# EAGLE board ZED-F9P_NEO-D9S_Combo-Panel (EAGLE 9.6.2), part 1 of 3
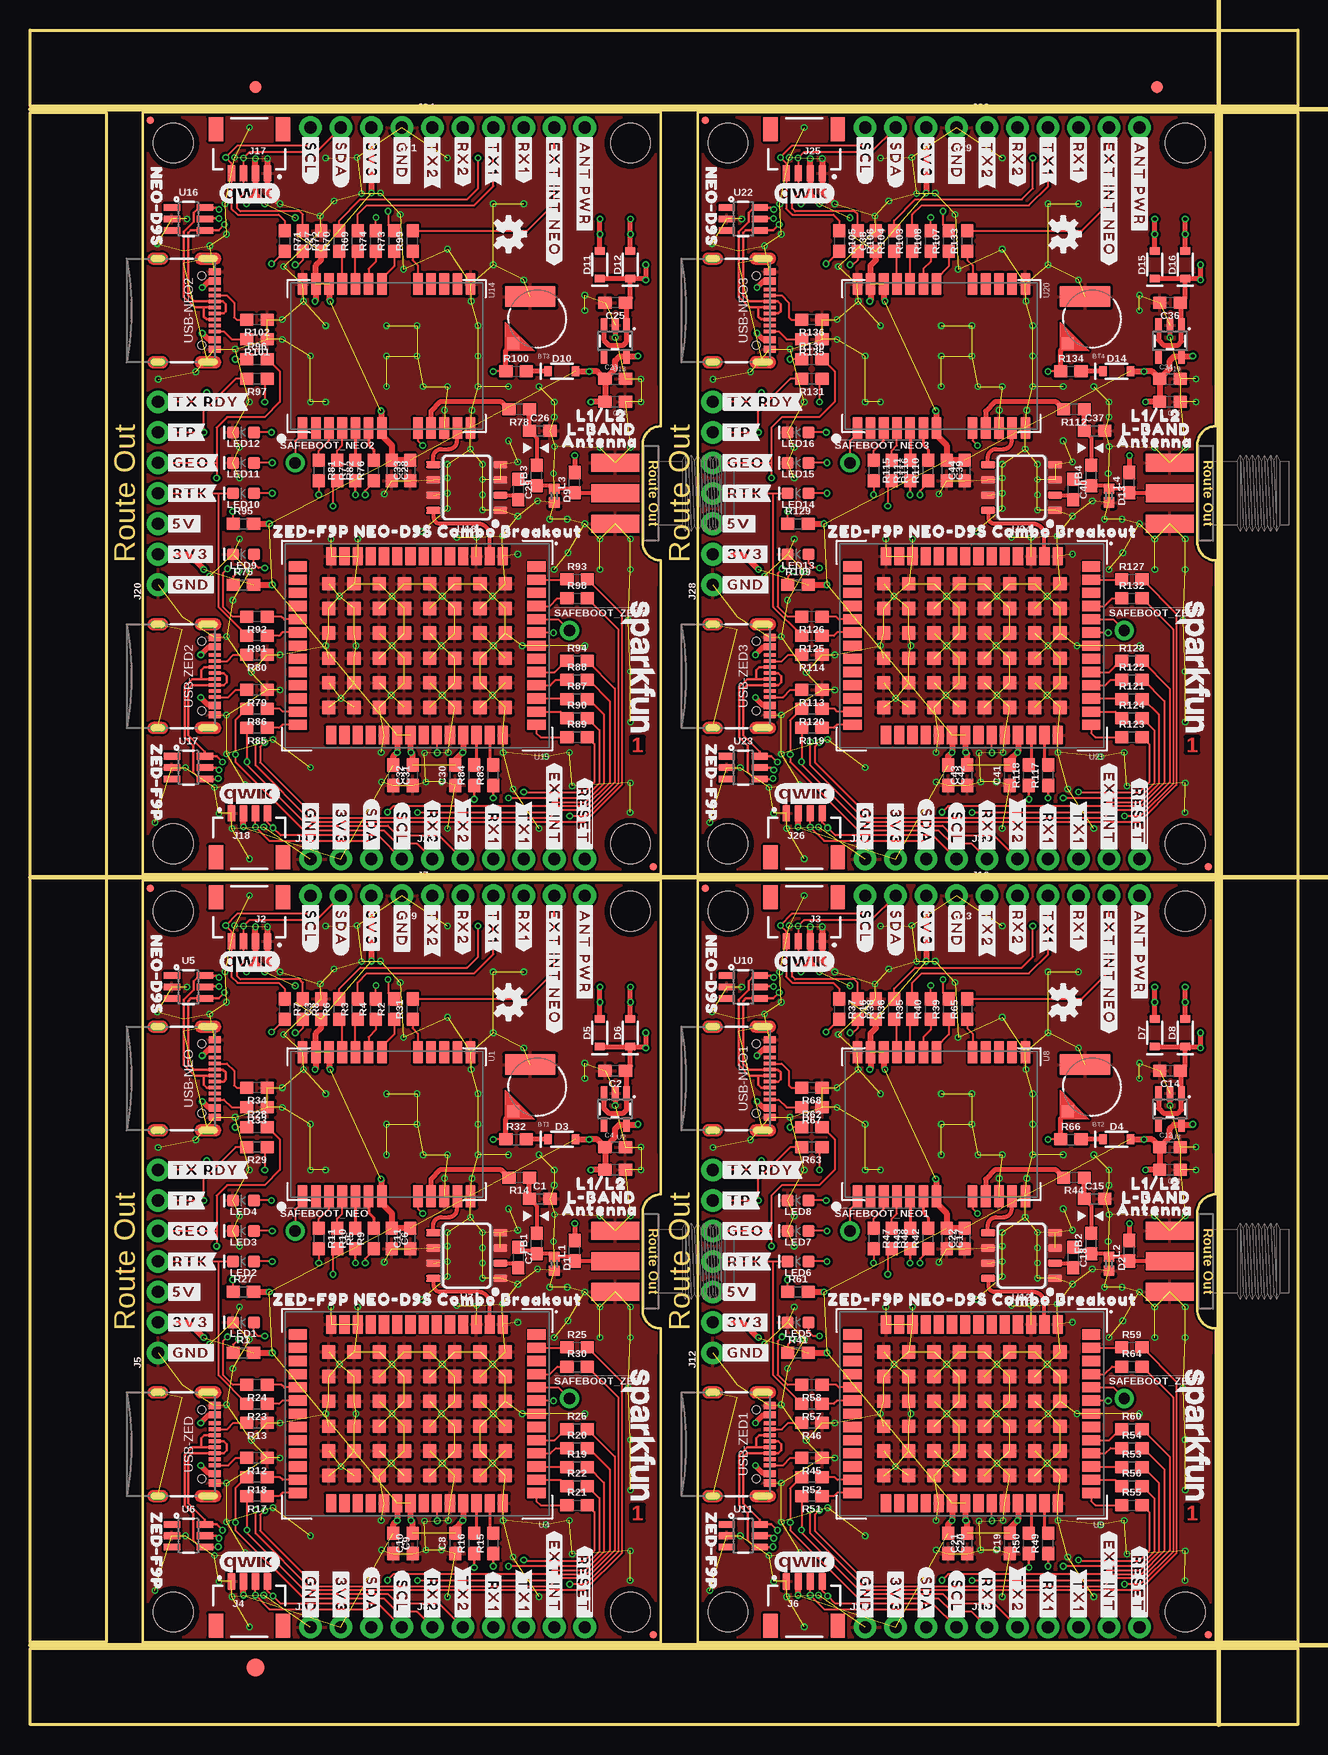
[diagram p0: board, top side]
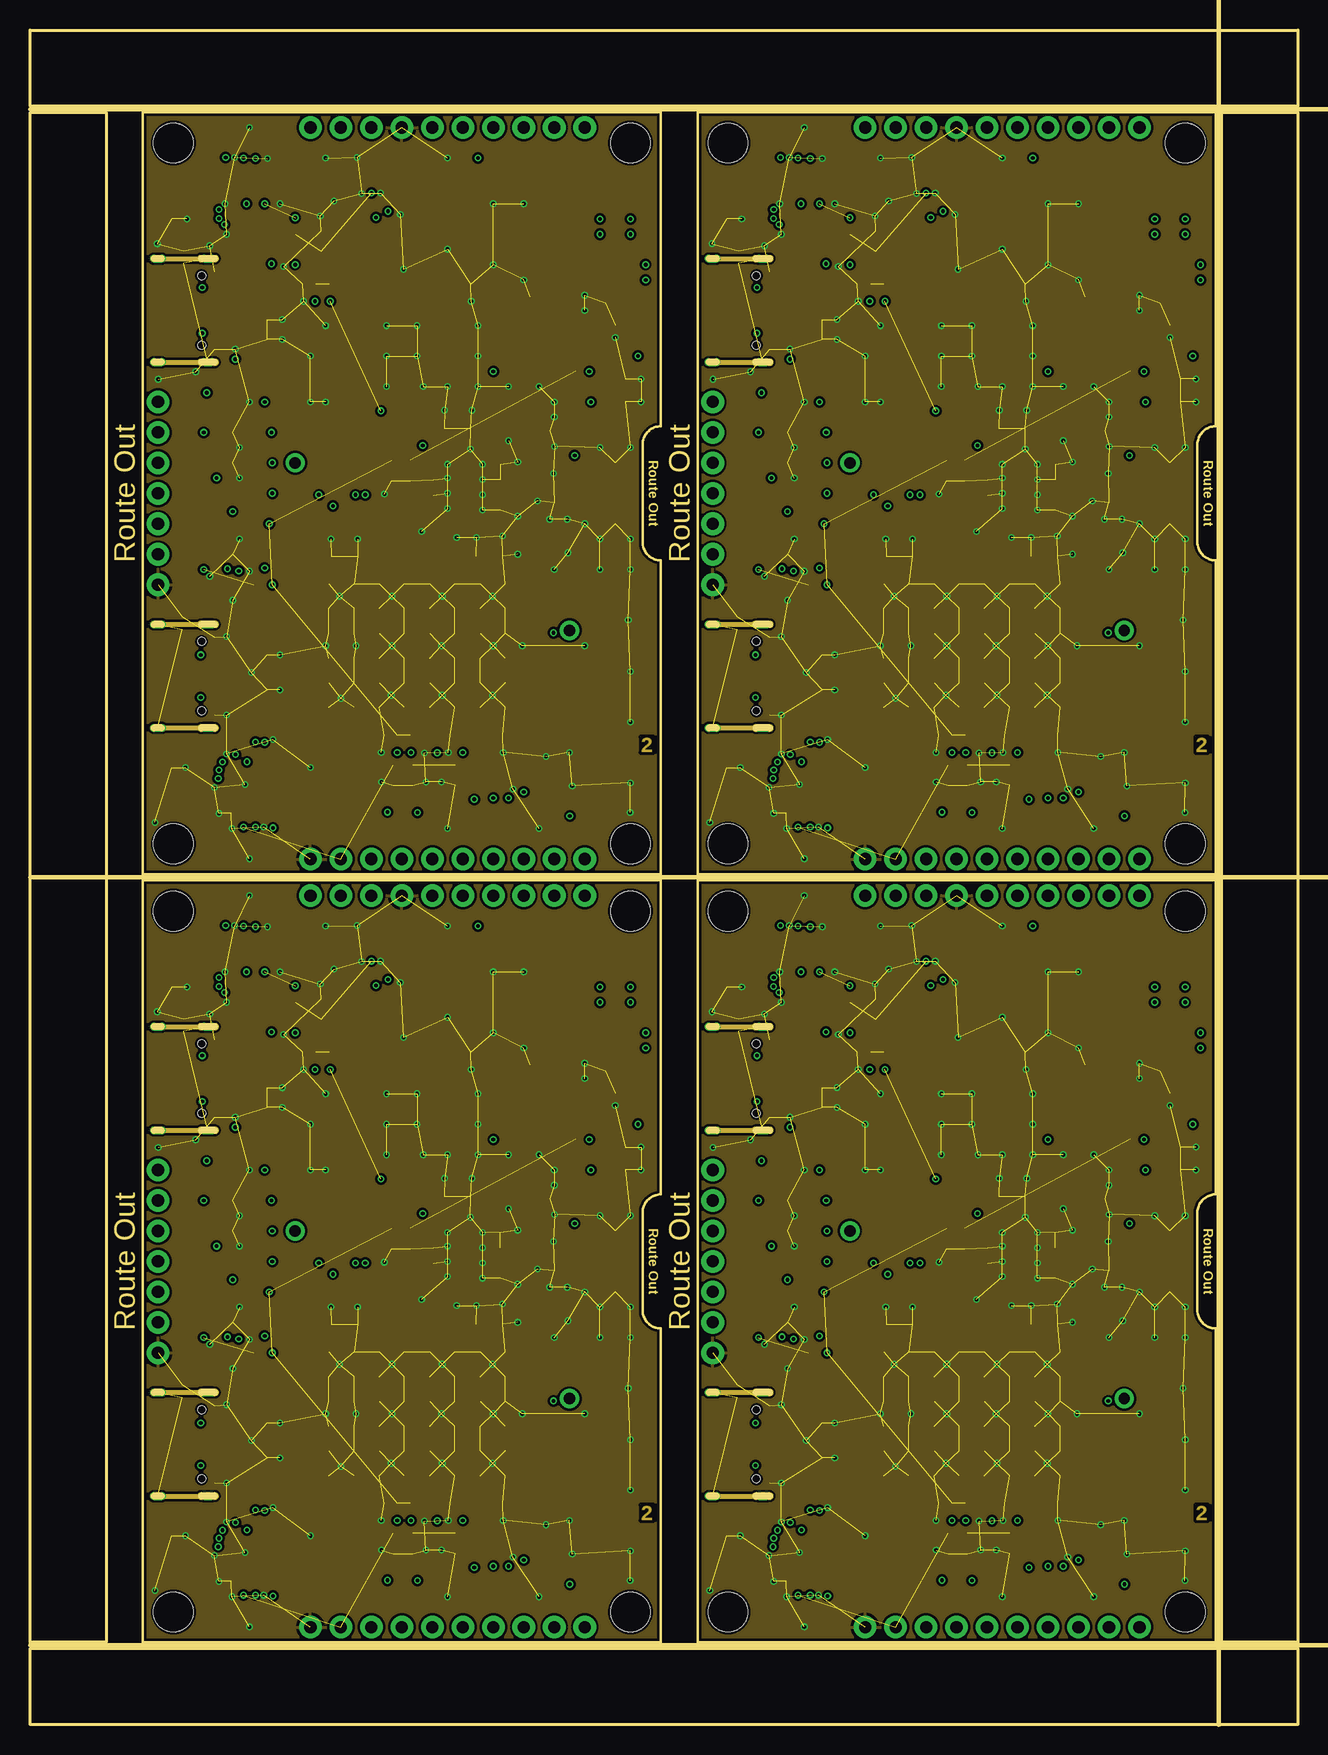
[diagram p1: board, inner layer Route2]
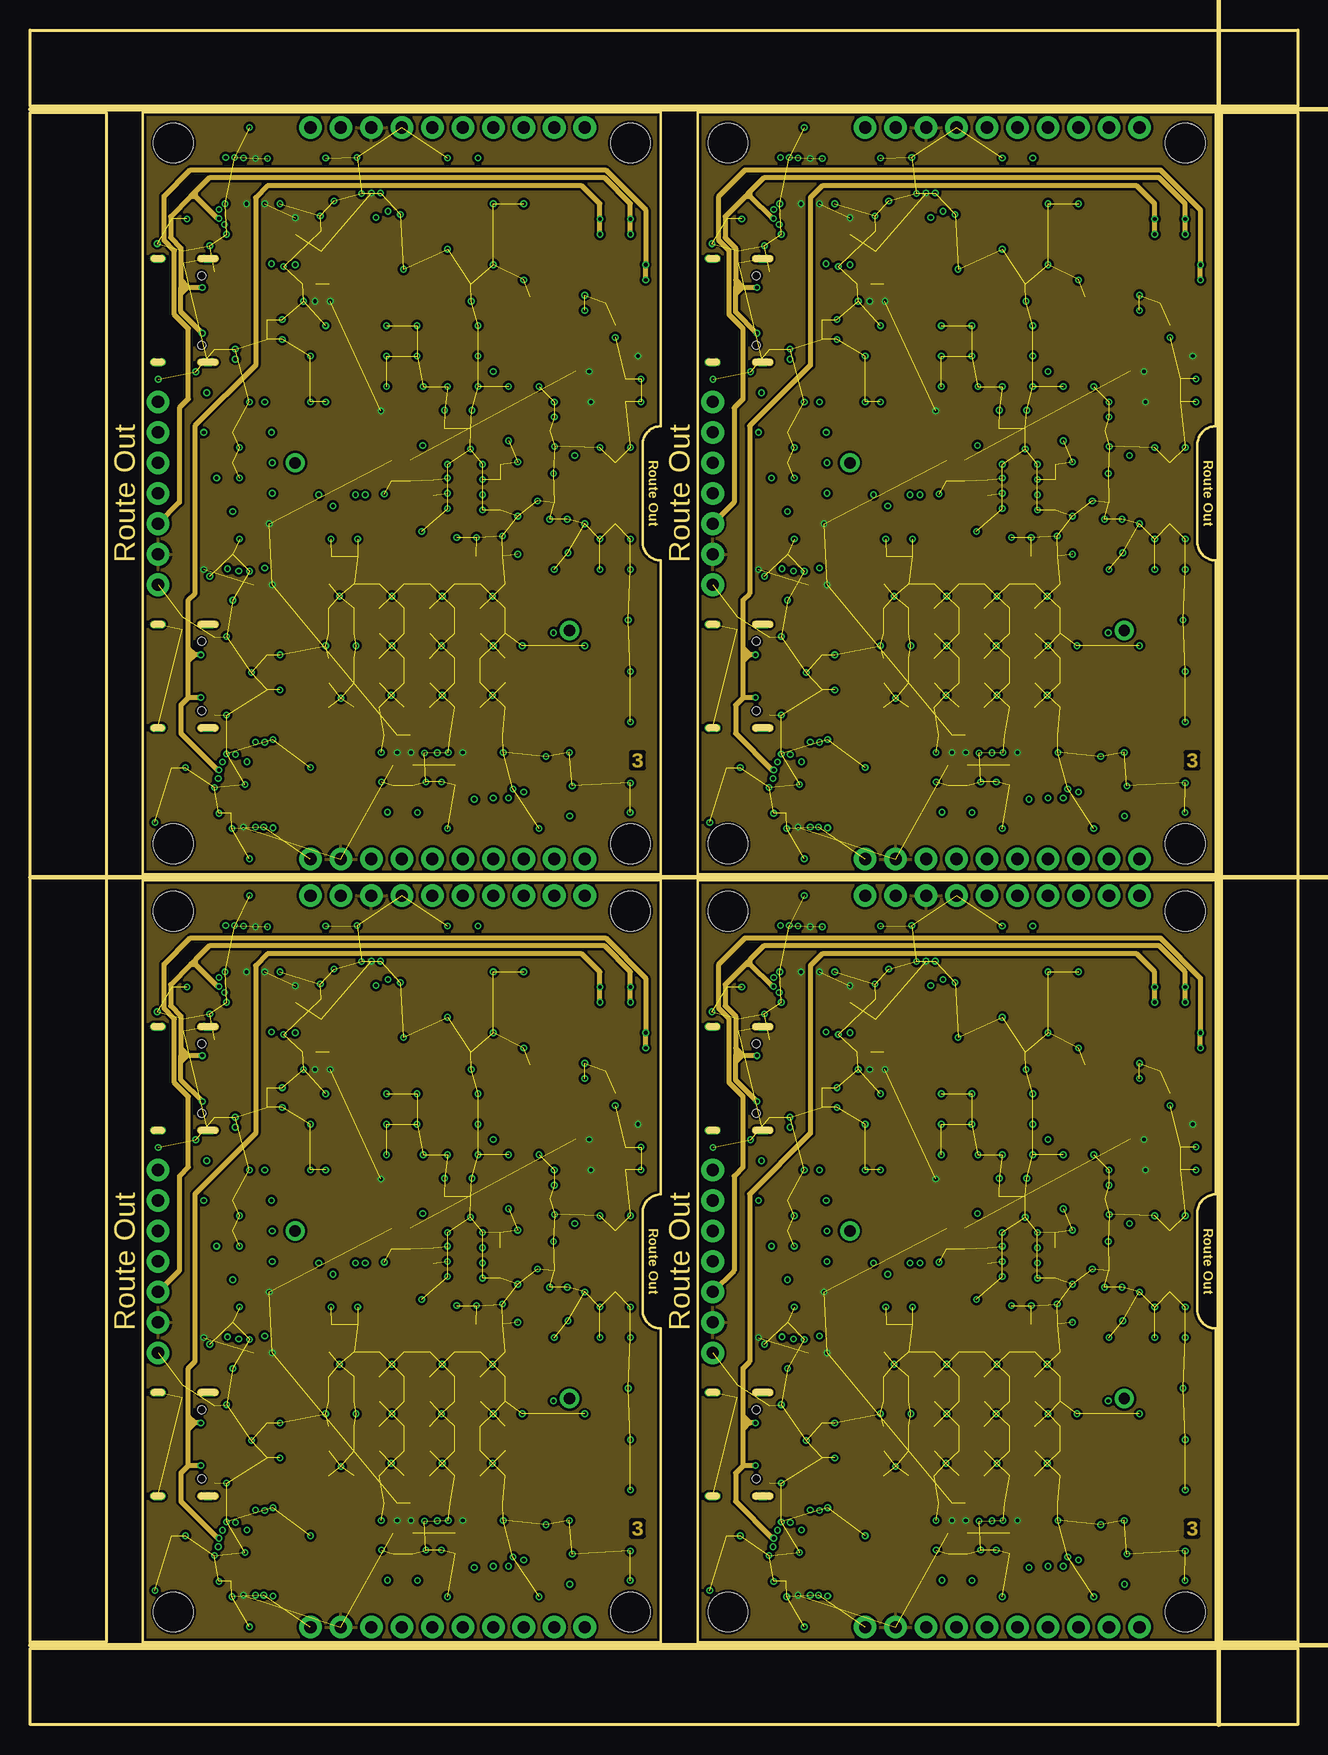
[diagram p2: board, inner layer Route15]
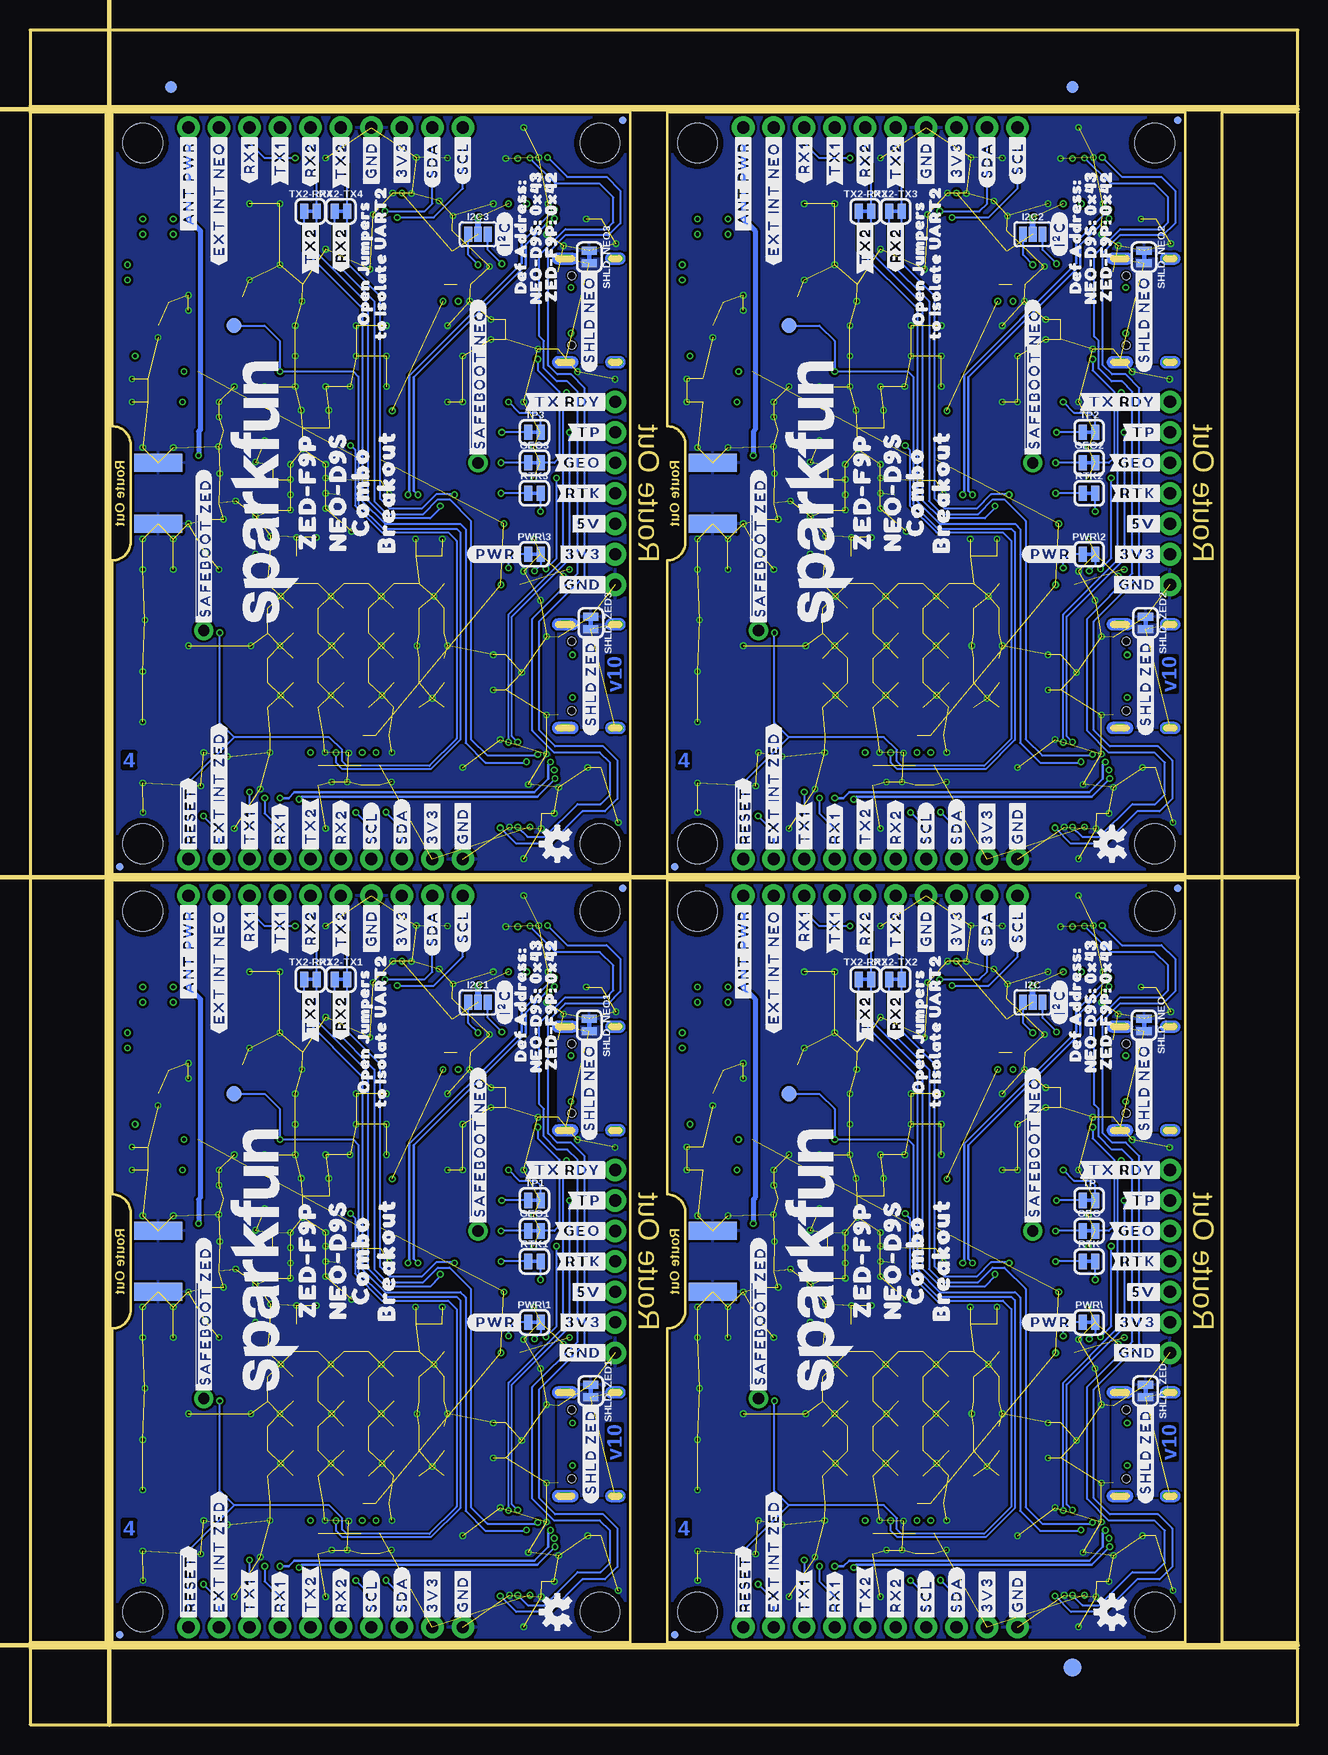
[diagram p3: board, bottom side, seen from below]

Size 105.66 x 141.22 mm. Coordinates in mm from the lower left corner, seen from the top.
Outline: 9.4,6.86 9.4,70.36 52.58,70.36 52.58,44.2 arc90 51.05,42.67 51.05,34.54 arc90 52.58,33.02 52.58,6.86 9.4,6.86
Outline: 55.63,6.86 55.63,70.36 98.81,70.36 98.81,44.2 arc90 97.28,42.67 97.28,34.54 arc90 98.81,33.02 98.81,6.86 55.63,6.86
Outline: 9.4,70.87 9.4,134.37 52.58,134.37 52.58,108.2 arc90 51.05,106.68 51.05,98.55 arc90 52.58,97.03 52.58,70.87 9.4,70.87
Outline: 55.63,70.87 55.63,134.37 98.81,134.37 98.81,108.2 arc90 97.28,106.68 97.28,98.55 arc90 98.81,97.03 98.81,70.87 55.63,70.87
Outline: 0,6.35 105.66,6.35 105.66,0 0,0 0,6.35
Outline: 99.31,134.37 105.66,134.37 105.66,6.86 99.31,6.86 99.31,134.37
Outline: 0,141.22 105.66,141.22 105.66,134.87 0,134.87 0,141.22
Outline: 0,134.37 6.35,134.37 6.35,6.86 0,6.86 0,134.37
Copper layers (1*2*15*16): Top 0.035559375mm / dielectric 0.47751875mm / Route2 0.035559375mm / dielectric 0.47751875mm / Route15 0.035559375mm / dielectric 0.47751875mm / Bottom 0.035559375mm
Design rules "ZED-F9P_NEO-D9S_Combo": minimum track width 5mil, minimum drill 0.2mm, track to track 5mil, track to pad 5mil, pad to pad 5mil, via to via 5mil, smd to smd 5mil, copper to edge 7mil, drill to drill 7mil, minimum pad ring 5mil, minimum via ring 5mil, stop-mask expansion 2.5mil, vias tented up to drill 25mil, thermal gap 10mil
Net classes: 2 3.3V: width 0.508 mm; 4 DiffPair: width 0.203 mm, clearance 0.127 mm
tRestrict: 12 lines
Milling: 4 lines

## Footprints (pad centres in the part's own frame; a part is rotated, then mirrored left to right if it is on the bottom)
1X01_NO_SILK = drill 0.95 pad 1.6: 1 0,0
MS421R_IV03E = smd 1 x 1: + 2.022,2.032 | smd 4.2 x 1.7: - 0.6,-1.85
0603 = smd 1.1 x 1: 1 -0.85,0; 2 0.85,0
0402 = smd 0.85 x 0.9: 1 -0.58,0; 2 0.58,0
SOD-323 = smd 0.63 x 0.83: A 1.15,0; C -1.15,0
FIDUCIAL-1X2 = smd 1 x 1: 1 0,0
FIDUCIAL-1.5X3 = smd 1.5 x 1.5: 1 0,0
SMT-JUMPER_2_NC_TRACE_SILK = smd 0.66 x 1.27: 1 -0.521,0; 2 0.521,0
SMT-JUMPER_3_NO_SILK = smd 0.635 x 1.27: 1 -0.813,0; 2 0,0; 3 0.813,0
SMA-EDGE = smd 1.5 x 4: GND@0 -2.54,0; GND@1 2.54,0; SIG 0,0 | smd 1.5 x 4 bottom: GND@2 -2.54,0; GND@3 2.54,0
JST04_1MM_RA = smd 0.6 x 1.35: 1 -1.5,0; 2 -0.5,0; 3 0.5,0; 4 1.5,0 | smd 1.2 x 2: NC1 2.8,-3.675; NC2 -2.8,-3.675
1X07_NO_SILK = drill 1.016 pad 1.88: 1 0,0; 2 2.54,0; 3 5.08,0; 4 7.62,0; 5 10.16,0; 6 12.7,0; 7 15.24,0
1X06_NO_SILK = drill 1.016 pad 1.88: 1 0,0; 2 2.54,0; 3 5.08,0; 4 7.62,0; 5 10.16,0; 6 12.7,0
1X04_NO_SILK = drill 1.016 pad 1.88: 1 0,0; 2 2.54,0; 3 5.08,0; 4 7.62,0
STAND-OFF = hole 3.302: 0,0
MICRO-FIDUCIAL = smd 0.635 x 0.635: 1 0,0
0603_NO-CREAM = smd 1.1 x 1: 1 -0.85,0; 2 0.85,0
LED-0603 = smd 1 x 1: A -0.877,0; C 0.877,0
NEO-M9N/M8T/M8U/D9S = smd 1.8 x 0.8: 1 6,-7; 2 6,-5.9; 3 6,-4.8; 4 6,-3.7; 5 6,-2.6; 6 6,-1.5; 7 6,-0.4; 8 6,2.6; 9 6,3.7; 10 6,4.8; 11 6,5.9; 12 6,7; 13 -6,7; 14 -6,5.9; 15 -6,4.8; 16 -6,3.7; 17 -6,2.6; 18 -6,-0.4; 19 -6,-1.5; 20 -6,-2.6; 21 -6,-3.7; 22 -6,-4.8; 23 -6,-5.9; 24 -6,-7
SOT23-5 = smd 0.55 x 1.2: 1 -0.95,-1.3; 2 0,-1.3; 3 0.95,-1.3; 4 0.95,1.3; 5 -0.95,1.3
ZED-F9P = smd 0.85 x 1.52: 1 -7.15,-7.45; 2 -6.05,-7.45; 3 -4.95,-7.45; 4 -3.85,-7.45; 5 -2.75,-7.45; 6 -1.65,-7.45; 7 -0.55,-7.45; 8 0.55,-7.45; 9 1.65,-7.45; 10 2.75,-7.45; 11 3.85,-7.45; 12 4.95,-7.45; 13 6.05,-7.45; 14 7.15,-7.45; 28 7.15,7.45; 29 6.05,7.45; 30 4.95,7.45; 31 3.85,7.45; 32 2.75,7.45; 33 1.65,7.45; 34 0.55,7.45; 35 -0.55,7.45; 36 -1.65,7.45; 37 -2.75,7.45; 38 -3.85,7.45; 39 -4.95,7.45; 40 -6.05,7.45; 41 -7.15,7.45 | smd 1.52 x 0.85: 15 9.95,-6.6; 16 9.95,-5.5; 17 9.95,-4.4; 18 9.95,-3.3; 19 9.95,-2.2; 20 9.95,-1.1; 21 9.95,0; 22 9.95,1.1; 23 9.95,2.2; 24 9.95,3.3; 25 9.95,4.4; 26 9.95,5.5; 27 9.95,6.6; 42 -9.95,6.6; 43 -9.95,5.5; 44 -9.95,4.4; 45 -9.95,3.3; 46 -9.95,2.2; 47 -9.95,1.1; 48 -9.95,0; 49 -9.95,-1.1; 50 -9.95,-2.2; 51 -9.95,-3.3; 52 -9.95,-4.4; 53 -9.95,-5.5; 54 -9.95,-6.6 | smd 1.1 x 1.1: 55 -1.05,-1.05; 56 -3.15,-1.05; 57 -5.25,-1.05; 58 -7.35,-1.05; 59 -1.05,-3.1; 60 -3.15,-3.1; 61 -5.25,-3.1; 62 -7.35,-3.1; 63 -1.05,-5.15; 64 -3.15,-5.15; 65 -5.25,-5.15; 66 -7.35,-5.15; 67 -1.05,5.15; 68 -3.15,5.15; 69 -5.25,5.15; 70 -7.35,5.15; 71 -1.05,3.1; 72 -3.15,3.1; 73 -5.25,3.1; 74 -7.35,3.1; 75 -1.05,1.05; 76 -3.15,1.05; 77 -5.25,1.05; 78 -7.35,1.05; 79 1.05,1.05; 80 3.15,1.05; 81 5.25,1.05; 82 7.35,1.05; 83 1.05,3.1; 84 3.15,3.1; 85 5.25,3.1; 86 7.35,3.1; 87 1.05,5.15; 88 3.15,5.15; 89 5.25,5.15; 90 7.35,5.15; 91 1.05,-5.15; 92 3.15,-5.15; 93 5.25,-5.15; 94 7.35,-5.15; 95 1.05,-3.1; 96 3.15,-3.1; 97 5.25,-3.1; 98 7.35,-3.1; 99 1.05,-1.05; 100 3.15,-1.05; 101 5.25,-1.05; 102 7.35,-1.05
SOT-23-6 = smd 0.55 x 1.35: 1 -0.95,-1.375; 2 0,-1.375; 3 0.95,-1.375; 4 0.95,1.375; 5 0,1.375; 6 -0.95,1.375
XX21 = smd 0.6 x 1.2: 1 -1.905,-2.8; 2 -0.635,-2.8; 3 0.635,-2.8; 4 1.905,-2.8; 5 1.905,2.8; 6 0.635,2.8; 7 -0.635,2.8; 8 -1.905,2.8
USB-C-16P_4LAYER-PADS = smd 0.3 x 1: A5 -1.25,-0.34; A6 -0.25,-0.34; A7 0.25,-0.34; A8 1.25,-0.34; B5 1.75,-0.34; B6 0.75,-0.34; B7 -0.75,-0.34; B8 -1.75,-0.34 | smd 0.6 x 1: GND -3.225,-0.34; GND2 3.225,-0.34; VBUS1 -2.45,-0.34; VBUS2 2.45,-0.34 | drill 0.4 pad 0.6 long: SHLD1 -4.318,-0.915; SHLD2 4.318,-0.915; SHLD3 -4.318,-5.095; SHLD4 4.318,-5.095 | hole 0.65: -2.89,-1.445; 2.89,-1.445
PAD.03X.05 = smd 1.27 x 1.27: 1 0,0

## Placement (x,y rotation side)
!SAFEBOOT_NEO!  TEST-POINTPOGO_PTH  [1X01_NO_SILK]  22.1,41.15 0 top
!SAFEBOOT_NEO!1  TEST-POINTPOGO_PTH  [1X01_NO_SILK]  68.33,41.15 0 top
!SAFEBOOT_NEO!2  TEST-POINTPOGO_PTH  [1X01_NO_SILK]  22.1,105.16 0 top
!SAFEBOOT_NEO!3  TEST-POINTPOGO_PTH  [1X01_NO_SILK]  68.33,105.16 0 top
!SAFEBOOT_ZED!  TEST-POINTPOGO_PTH  [1X01_NO_SILK]  44.96,27.18 0 top
!SAFEBOOT_ZED!1  TEST-POINTPOGO_PTH  [1X01_NO_SILK]  91.19,27.18 0 top
!SAFEBOOT_ZED!2  TEST-POINTPOGO_PTH  [1X01_NO_SILK]  44.96,91.19 0 top
!SAFEBOOT_ZED!3  TEST-POINTPOGO_PTH  [1X01_NO_SILK]  91.19,91.19 0 top
BT1  RELOWABLE_BATTERY_MS421R  [MS421R_IV03E]  42.29,53.15 180 top
BT2  RELOWABLE_BATTERY_MS421R  [MS421R_IV03E]  88.52,53.15 180 top
BT3  RELOWABLE_BATTERY_MS421R  [MS421R_IV03E]  42.29,117.16 180 top
BT4  RELOWABLE_BATTERY_MS421R  [MS421R_IV03E]  88.52,117.16 180 top
C1  47pF  [0603]  42.48,43.81 0 top
C2  1.0uF  [0603]  48.77,54.48 180 top
C3  1.0uF  [0603]  24.26,59.63 90 top
C4  1.0uF  [0603]  48.77,48.13 0 top
C5  0.1uF  [0603]  48.77,46.23 180 top
C6  1.0uF  [0603]  30.16,40.51 270 top
C7  47pF  [0603]  40.69,38.93 270 top
C8  1.0uF  [0603]  35.43,15.11 90 top
C9  1.0uF  [0603]  30.29,15.11 270 top
C10  0.1uF  [0603]  31.88,15.11 90 top
C11  0.1uF  [0603]  31.69,40.51 90 top
C12  1.0uF  [0603]  95,48.13 0 top
C13  0.1uF  [0603]  95,46.23 180 top
C14  1.0uF  [0603]  95,54.48 180 top
C15  47pF  [0603]  88.71,43.81 0 top
C16  1.0uF  [0603]  70.48,59.63 90 top
C17  1.0uF  [0603]  76.39,40.51 270 top
C18  47pF  [0603]  86.92,38.93 270 top
C19  1.0uF  [0603]  81.66,15.11 90 top
C20  1.0uF  [0603]  76.52,15.11 270 top
C21  0.1uF  [0603]  78.1,15.11 90 top
C22  0.1uF  [0603]  77.91,40.51 90 top
C23  1.0uF  [0603]  48.77,112.14 0 top
C24  0.1uF  [0603]  48.77,110.24 180 top
C25  1.0uF  [0603]  48.77,118.49 180 top
C26  47pF  [0603]  42.48,107.82 0 top
C27  1.0uF  [0603]  24.26,123.63 90 top
C28  1.0uF  [0603]  30.16,104.52 270 top
C29  47pF  [0603]  40.69,102.93 270 top
C30  1.0uF  [0603]  35.43,79.12 90 top
C31  1.0uF  [0603]  30.29,79.12 270 top
C32  0.1uF  [0603]  31.88,79.12 90 top
C33  0.1uF  [0603]  31.69,104.52 90 top
C34  1.0uF  [0603]  95,112.14 0 top
C35  0.1uF  [0603]  95,110.24 180 top
C36  1.0uF  [0603]  95,118.49 180 top
C37  47pF  [0603]  88.71,107.82 0 top
C38  1.0uF  [0603]  70.48,123.63 90 top
C39  1.0uF  [0603]  76.39,104.52 270 top
C40  47pF  [0603]  86.92,102.93 270 top
C41  1.0uF  [0603]  81.66,79.12 90 top
C42  1.0uF  [0603]  76.52,79.12 270 top
C43  0.1uF  [0603]  78.1,79.12 90 top
C44  0.1uF  [0603]  77.91,104.52 90 top
D1  PESD0402-0402  [0402]  43.69,38.42 270 top
D2  PESD0402-0402  [0402]  89.92,38.42 270 top
D3  0.5A/40V/420mV  [SOD-323]  44.32,48.77 0 top
D4  0.5A/40V/420mV  [SOD-323]  90.55,48.77 0 top
D5  1A/23V/620mV  [SOD-323]  47.5,57.66 90 top
D6  1A/23V/620mV  [SOD-323]  50.04,57.66 90 top
D7  1A/23V/620mV  [SOD-323]  93.73,57.66 90 top
D8  1A/23V/620mV  [SOD-323]  96.27,57.66 90 top
D9  PESD0402-0402  [0402]  43.69,102.43 270 top
D10  0.5A/40V/420mV  [SOD-323]  44.32,112.78 0 top
D11  1A/23V/620mV  [SOD-323]  47.5,121.67 90 top
D12  1A/23V/620mV  [SOD-323]  50.04,121.67 90 top
D13  PESD0402-0402  [0402]  89.92,102.43 270 top
D14  0.5A/40V/420mV  [SOD-323]  90.55,112.78 0 top
D15  1A/23V/620mV  [SOD-323]  93.73,121.67 90 top
D16  1A/23V/620mV  [SOD-323]  96.27,121.67 90 top
E$1  [FIDUCIAL-1X2]  18.8,136.46 0 top
E$2  [FIDUCIAL-1X2]  18.8,136.46 0 bottom
E$3  [FIDUCIAL-1X2]  93.92,136.46 0 top
E$4  [FIDUCIAL-1X2]  93.92,136.46 0 bottom
E$5  [FIDUCIAL-1.5X3]  18.8,4.76 0 top
E$6  [FIDUCIAL-1.5X3]  18.8,4.76 0 bottom
FB1  30Ω/1.8A  [0603]  42.21,40.09 90 top
FB2  30Ω/1.8A  [0603]  88.44,40.09 90 top
FB3  30Ω/1.8A  [0603]  42.21,104.1 90 top
FB4  30Ω/1.8A  [0603]  88.44,104.1 90 top
GEO  JUMPER-SMT_2_NC_TRACE_SILK  [SMT-JUMPER_2_NC_TRACE_SILK]  17.4,41.15 0 bottom
GEO1  JUMPER-SMT_2_NC_TRACE_SILK  [SMT-JUMPER_2_NC_TRACE_SILK]  63.63,41.15 0 bottom
GEO2  JUMPER-SMT_2_NC_TRACE_SILK  [SMT-JUMPER_2_NC_TRACE_SILK]  17.4,105.16 0 bottom
GEO3  JUMPER-SMT_2_NC_TRACE_SILK  [SMT-JUMPER_2_NC_TRACE_SILK]  63.63,105.16 0 bottom
I2C  JUMPER-SMT_3_NO_SILK  [SMT-JUMPER_3_NO_SILK]  22.1,60.2 0 bottom
I2C1  JUMPER-SMT_3_NO_SILK  [SMT-JUMPER_3_NO_SILK]  68.33,60.2 0 bottom
I2C2  JUMPER-SMT_3_NO_SILK  [SMT-JUMPER_3_NO_SILK]  22.1,124.21 0 bottom
I2C3  JUMPER-SMT_3_NO_SILK  [SMT-JUMPER_3_NO_SILK]  68.33,124.21 0 bottom
J1  ANTENNA-SMA-GROUNDEDEDGE_SMA  [SMA-EDGE]  48.77,38.61 270 top
J2  Qwiic Right Angle  [JST04_1MM_RA]  18.29,65.28 180 top
J3  Qwiic Right Angle  [JST04_1MM_RA]  64.52,65.28 180 top
J4  Qwiic Right Angle  [JST04_1MM_RA]  18.29,11.94 0 top
J5  [1X07_NO_SILK]  10.67,30.99 90 top
J6  Qwiic Right Angle  [JST04_1MM_RA]  64.52,11.94 0 top
J7  [1X06_NO_SILK]  33.53,69.09 0 top
J8  [1X06_NO_SILK]  33.53,8.13 0 top
J9  [1X04_NO_SILK]  30.99,69.09 180 top
J10  [1X04_NO_SILK]  23.37,8.13 0 top
J11  ANTENNA-SMA-GROUNDEDEDGE_SMA  [SMA-EDGE]  95,38.61 270 top
J12  [1X07_NO_SILK]  56.9,30.99 90 top
J13  [1X04_NO_SILK]  77.22,69.09 180 top
J14  [1X04_NO_SILK]  69.6,8.13 0 top
J15  [1X06_NO_SILK]  79.76,8.13 0 top
J16  [1X06_NO_SILK]  79.76,69.09 0 top
J17  Qwiic Right Angle  [JST04_1MM_RA]  18.29,129.29 180 top
J18  Qwiic Right Angle  [JST04_1MM_RA]  18.29,75.95 0 top
J19  ANTENNA-SMA-GROUNDEDEDGE_SMA  [SMA-EDGE]  48.77,102.62 270 top
J20  [1X07_NO_SILK]  10.67,95 90 top
J21  [1X04_NO_SILK]  30.99,133.1 180 top
J22  [1X04_NO_SILK]  23.37,72.14 0 top
J23  [1X06_NO_SILK]  33.53,72.14 0 top
J24  [1X06_NO_SILK]  33.53,133.1 0 top
J25  Qwiic Right Angle  [JST04_1MM_RA]  64.52,129.29 180 top
J26  Qwiic Right Angle  [JST04_1MM_RA]  64.52,75.95 0 top
J27  ANTENNA-SMA-GROUNDEDEDGE_SMA  [SMA-EDGE]  95,102.62 270 top
J28  [1X07_NO_SILK]  56.9,95 90 top
J29  [1X04_NO_SILK]  77.22,133.1 180 top
J30  [1X04_NO_SILK]  69.6,72.14 0 top
J31  [1X06_NO_SILK]  79.76,72.14 0 top
J32  [1X06_NO_SILK]  79.76,133.1 0 top
JP1  STAND-OFF  [STAND-OFF]  58.17,67.79 0 top
JP2  STAND-OFF  [STAND-OFF]  96.27,67.79 0 top
JP3  FIDUCIALUFIDUCIAL  [MICRO-FIDUCIAL]  98.17,7.49 0 top
JP4  FIDUCIALUFIDUCIAL  [MICRO-FIDUCIAL]  56.26,69.7 0 top
JP5  FIDUCIALUFIDUCIAL  [MICRO-FIDUCIAL]  98.17,7.49 0 bottom
JP6  FIDUCIALUFIDUCIAL  [MICRO-FIDUCIAL]  56.26,69.7 0 bottom
JP7  STAND-OFF  [STAND-OFF]  58.17,9.4 0 top
JP8  STAND-OFF  [STAND-OFF]  96.27,9.4 0 top
JP9  STAND-OFF  [STAND-OFF]  11.94,131.8 0 top
JP10  STAND-OFF  [STAND-OFF]  50.04,131.8 0 top
JP11  FIDUCIALUFIDUCIAL  [MICRO-FIDUCIAL]  51.94,71.5 0 top
JP12  FIDUCIALUFIDUCIAL  [MICRO-FIDUCIAL]  10.03,133.71 0 top
JP13  FIDUCIALUFIDUCIAL  [MICRO-FIDUCIAL]  51.94,71.5 0 bottom
JP14  FIDUCIALUFIDUCIAL  [MICRO-FIDUCIAL]  10.03,133.71 0 bottom
JP15  STAND-OFF  [STAND-OFF]  11.94,73.41 0 top
JP16  STAND-OFF  [STAND-OFF]  50.04,73.41 0 top
JP17  STAND-OFF  [STAND-OFF]  58.17,131.8 0 top
JP18  STAND-OFF  [STAND-OFF]  96.27,131.8 0 top
JP19  FIDUCIALUFIDUCIAL  [MICRO-FIDUCIAL]  98.17,71.5 0 top
JP20  FIDUCIALUFIDUCIAL  [MICRO-FIDUCIAL]  56.26,133.71 0 top
JP21  FIDUCIALUFIDUCIAL  [MICRO-FIDUCIAL]  51.94,7.49 0 top
JP22  FIDUCIALUFIDUCIAL  [MICRO-FIDUCIAL]  98.17,71.5 0 bottom
JP23  FIDUCIALUFIDUCIAL  [MICRO-FIDUCIAL]  56.26,133.71 0 bottom
JP24  STAND-OFF  [STAND-OFF]  58.17,73.41 0 top
JP25  STAND-OFF  [STAND-OFF]  96.27,73.41 0 top
JP31  STAND-OFF  [STAND-OFF]  11.94,67.79 0 top
JP41  STAND-OFF  [STAND-OFF]  50.04,67.79 0 top
JP61  FIDUCIALUFIDUCIAL  [MICRO-FIDUCIAL]  10.03,69.7 0 top
JP71  FIDUCIALUFIDUCIAL  [MICRO-FIDUCIAL]  51.94,7.49 0 bottom
JP81  FIDUCIALUFIDUCIAL  [MICRO-FIDUCIAL]  10.03,69.7 0 bottom
JP91  STAND-OFF  [STAND-OFF]  11.94,9.4 0 top
JP101  STAND-OFF  [STAND-OFF]  50.04,9.4 0 top
L1  DNP  [0603_NO-CREAM]  45.39,39.5 90 top
L2  DNP  [0603_NO-CREAM]  91.62,39.5 90 top
L3  DNP  [0603_NO-CREAM]  45.39,103.51 90 top
L4  DNP  [0603_NO-CREAM]  91.62,103.51 90 top
LED1  RED  [LED-0603]  17.78,33.53 180 top
LED2  BLUE  [LED-0603]  17.78,38.61 180 top
LED3  BLUE  [LED-0603]  17.78,41.15 180 top
LED4  BLUE  [LED-0603]  17.78,43.69 180 top
LED5  RED  [LED-0603]  64.01,33.53 180 top
LED6  BLUE  [LED-0603]  64.01,38.61 180 top
LED7  BLUE  [LED-0603]  64.01,41.15 180 top
LED8  BLUE  [LED-0603]  64.01,43.69 180 top
LED9  RED  [LED-0603]  17.78,97.54 180 top
LED10  BLUE  [LED-0603]  17.78,102.62 180 top
LED11  BLUE  [LED-0603]  17.78,105.16 180 top
LED12  BLUE  [LED-0603]  17.78,107.7 180 top
LED13  RED  [LED-0603]  64.01,97.54 180 top
LED14  BLUE  [LED-0603]  64.01,102.62 180 top
LED15  BLUE  [LED-0603]  64.01,105.16 180 top
LED16  BLUE  [LED-0603]  64.01,107.7 180 top
LOGO1  OSHW-LOGOS  [OSHW-LOGO-S]  39.88,60.2 270 top
LOGO2  SFE_LOGO_NAME.1_INCH  [SFE_LOGO_NAME_.1]  50.67,24.13 270 top
LOGO3  QWIIC_LOGO_5MM  [QWIIC_5MM]  18.29,13.59 0 top
LOGO4  OSHW-LOGOS  [OSHW-LOGO-S]  15.49,9.4 90 bottom
LOGO5  OSHW-LOGOS  [OSHW-LOGO-S]  61.72,9.4 90 bottom
LOGO6  QWIIC_LOGO_5MM  [QWIIC_5MM]  18.29,63.63 0 top
LOGO7  OSHW-LOGOS  [OSHW-LOGO-S]  86.11,60.2 270 top
LOGO8  SFE_LOGO_NAME.1_INCH  [SFE_LOGO_NAME_.1]  96.9,24.13 270 top
LOGO9  QWIIC_LOGO_5MM  [QWIIC_5MM]  64.52,13.59 0 top
LOGO10  QWIIC_LOGO_5MM  [QWIIC_5MM]  64.52,63.63 0 top
LOGO11  OSHW-LOGOS  [OSHW-LOGO-S]  15.49,73.41 90 bottom
LOGO12  OSHW-LOGOS  [OSHW-LOGO-S]  39.88,124.21 270 top
LOGO13  SFE_LOGO_NAME.1_INCH  [SFE_LOGO_NAME_.1]  50.67,88.14 270 top
LOGO14  QWIIC_LOGO_5MM  [QWIIC_5MM]  18.29,77.6 0 top
LOGO15  QWIIC_LOGO_5MM  [QWIIC_5MM]  18.29,127.64 0 top
LOGO16  OSHW-LOGOS  [OSHW-LOGO-S]  61.72,73.41 90 bottom
LOGO17  OSHW-LOGOS  [OSHW-LOGO-S]  86.11,124.21 270 top
LOGO18  SFE_LOGO_NAME.1_INCH  [SFE_LOGO_NAME_.1]  96.9,88.14 270 top
LOGO19  QWIIC_LOGO_5MM  [QWIIC_5MM]  64.52,77.6 0 top
LOGO20  QWIIC_LOGO_5MM  [QWIIC_5MM]  64.52,127.64 0 top
PWR\  JUMPER-SMT_2_NC_TRACE_SILK  [SMT-JUMPER_2_NC_TRACE_SILK]  17.4,33.53 0 bottom
PWR\1  JUMPER-SMT_2_NC_TRACE_SILK  [SMT-JUMPER_2_NC_TRACE_SILK]  63.63,33.53 0 bottom
PWR\2  JUMPER-SMT_2_NC_TRACE_SILK  [SMT-JUMPER_2_NC_TRACE_SILK]  17.4,97.54 0 bottom
PWR\3  JUMPER-SMT_2_NC_TRACE_SILK  [SMT-JUMPER_2_NC_TRACE_SILK]  63.63,97.54 0 bottom
R1  4.7k  [0603]  17.78,30.99 0 top
R2  33  [0603]  30.35,59.63 90 top
R3  33  [0603]  27.3,59.63 90 top
R4  33  [0603]  28.83,59.63 90 top
R5  33  [0603]  25.59,40.51 270 top
R6  33  [0603]  25.78,59.63 90 top
R7  2.2k  [0603]  21.21,59.63 270 top
R8  2.2k  [0603]  22.73,59.63 270 top
R9  27  [0603]  28.64,40.51 90 top
R10  27  [0603]  27.11,40.51 90 top
R11  33  [0603]  24.07,40.51 270 top
R12  5.1k  [0603]  18.92,22.23 180 top
R13  5.1k  [0603]  18.92,25.15 180 top
R14  10  [0603]  40.77,45.59 180 top
R15  27  [0603]  38.61,15.11 90 top
R16  27  [0603]  37.02,15.11 90 top
R17  33  [0603]  18.92,19.05 180 top
R18  33  [0603]  18.92,20.64 180 top
R19  33  [0603]  45.59,21.46 0 top
R20  33  [0603]  45.59,23.05 0 top
R21  33  [0603]  45.59,18.29 0 top
R22  33  [0603]  45.59,19.88 0 top
R23  33  [0603]  18.92,26.73 180 top
R24  33  [0603]  18.92,28.32 180 top
R25  33  [0603]  45.59,31.43 0 top
R26  33  [0603]  45.59,24.64 0 top
R27  1k  [0603]  17.78,36.07 0 top
R28  1k  [0603]  18.92,49.78 0 top
R29  1k  [0603]  18.92,48.13 180 top
R30  33  [0603]  45.59,29.84 0 top
R31  33  [0603]  31.88,59.63 90 top
R32  3.3k  [0603]  40.51,48.77 0 top
R33  5.1k  [0603]  18.92,51.43 180 top
R34  5.1k  [0603]  18.92,53.09 180 top
R35  33  [0603]  73.53,59.63 90 top
R36  33  [0603]  72.01,59.63 90 top
R37  2.2k  [0603]  67.44,59.63 270 top
R38  2.2k  [0603]  68.96,59.63 270 top
R39  33  [0603]  76.58,59.63 90 top
R40  33  [0603]  75.06,59.63 90 top
R41  4.7k  [0603]  64.01,30.99 0 top
R42  27  [0603]  74.87,40.51 90 top
R43  27  [0603]  73.34,40.51 90 top
R44  10  [0603]  86.99,45.59 180 top
R45  5.1k  [0603]  65.15,22.23 180 top
R46  5.1k  [0603]  65.15,25.15 180 top
R47  33  [0603]  70.29,40.51 270 top
R48  33  [0603]  71.82,40.51 270 top
R49  27  [0603]  84.84,15.11 90 top
R50  27  [0603]  83.25,15.11 90 top
R51  33  [0603]  65.15,19.05 180 top
R52  33  [0603]  65.15,20.64 180 top
R53  33  [0603]  91.82,21.46 0 top
R54  33  [0603]  91.82,23.05 0 top
R55  33  [0603]  91.82,18.29 0 top
R56  33  [0603]  91.82,19.88 0 top
R57  33  [0603]  65.15,26.73 180 top
R58  33  [0603]  65.15,28.32 180 top
R59  33  [0603]  91.82,31.43 0 top
R60  33  [0603]  91.82,24.64 0 top
R61  1k  [0603]  64.01,36.07 0 top
R62  1k  [0603]  65.15,49.78 0 top
R63  1k  [0603]  65.15,48.13 180 top
R64  33  [0603]  91.82,29.84 0 top
R65  33  [0603]  78.1,59.63 90 top
R66  3.3k  [0603]  86.74,48.77 0 top
R67  5.1k  [0603]  65.15,51.43 180 top
R68  5.1k  [0603]  65.15,53.09 180 top
R69  33  [0603]  27.3,123.63 90 top
R70  33  [0603]  25.78,123.63 90 top
R71  2.2k  [0603]  21.21,123.63 270 top
R72  2.2k  [0603]  22.73,123.63 270 top
R73  33  [0603]  30.35,123.63 90 top
R74  33  [0603]  28.83,123.63 90 top
R75  4.7k  [0603]  17.78,95 0 top
R76  27  [0603]  28.64,104.52 90 top
R77  27  [0603]  27.11,104.52 90 top
R78  10  [0603]  40.77,109.6 180 top
R79  5.1k  [0603]  18.92,86.23 180 top
R80  5.1k  [0603]  18.92,89.15 180 top
R81  33  [0603]  24.07,104.52 270 top
R82  33  [0603]  25.59,104.52 270 top
R83  27  [0603]  38.61,79.12 90 top
R84  27  [0603]  37.02,79.12 90 top
R85  33  [0603]  18.92,83.06 180 top
R86  33  [0603]  18.92,84.65 180 top
R87  33  [0603]  45.59,85.47 0 top
R88  33  [0603]  45.59,87.06 0 top
R89  33  [0603]  45.59,82.3 0 top
R90  33  [0603]  45.59,83.88 0 top
R91  33  [0603]  18.92,90.74 180 top
R92  33  [0603]  18.92,92.33 180 top
R93  33  [0603]  45.59,95.44 0 top
R94  33  [0603]  45.59,88.65 0 top
R95  1k  [0603]  17.78,100.08 0 top
R96  1k  [0603]  18.92,113.79 0 top
R97  1k  [0603]  18.92,112.14 180 top
R98  33  [0603]  45.59,93.85 0 top
R99  33  [0603]  31.88,123.63 90 top
R100  3.3k  [0603]  40.51,112.78 0 top
R101  5.1k  [0603]  18.92,115.44 180 top
R102  5.1k  [0603]  18.92,117.09 180 top
R103  33  [0603]  73.53,123.63 90 top
R104  33  [0603]  72.01,123.63 90 top
R105  2.2k  [0603]  67.44,123.63 270 top
R106  2.2k  [0603]  68.96,123.63 270 top
R107  33  [0603]  76.58,123.63 90 top
R108  33  [0603]  75.06,123.63 90 top
R109  4.7k  [0603]  64.01,95 0 top
R110  27  [0603]  74.87,104.52 90 top
R111  27  [0603]  73.34,104.52 90 top
R112  10  [0603]  86.99,109.6 180 top
R113  5.1k  [0603]  65.15,86.23 180 top
R114  5.1k  [0603]  65.15,89.15 180 top
R115  33  [0603]  70.29,104.52 270 top
R116  33  [0603]  71.82,104.52 270 top
R117  27  [0603]  84.84,79.12 90 top
R118  27  [0603]  83.25,79.12 90 top
R119  33  [0603]  65.15,83.06 180 top
R120  33  [0603]  65.15,84.65 180 top
R121  33  [0603]  91.82,85.47 0 top
R122  33  [0603]  91.82,87.06 0 top
R123  33  [0603]  91.82,82.3 0 top
R124  33  [0603]  91.82,83.88 0 top
R125  33  [0603]  65.15,90.74 180 top
R126  33  [0603]  65.15,92.33 180 top
R127  33  [0603]  91.82,95.44 0 top
R128  33  [0603]  91.82,88.65 0 top
R129  1k  [0603]  64.01,100.08 0 top
R130  1k  [0603]  65.15,113.79 0 top
R131  1k  [0603]  65.15,112.14 180 top
R132  33  [0603]  91.82,93.85 0 top
R133  33  [0603]  78.1,123.63 90 top
R134  3.3k  [0603]  86.74,112.78 0 top
R135  5.1k  [0603]  65.15,115.44 180 top
R136  5.1k  [0603]  65.15,117.09 180 top
RTK  JUMPER-SMT_2_NC_TRACE_SILK  [SMT-JUMPER_2_NC_TRACE_SILK]  17.4,38.61 0 bottom
RTK1  JUMPER-SMT_2_NC_TRACE_SILK  [SMT-JUMPER_2_NC_TRACE_SILK]  63.63,38.61 0 bottom
RTK2  JUMPER-SMT_2_NC_TRACE_SILK  [SMT-JUMPER_2_NC_TRACE_SILK]  17.4,102.62 0 bottom
RTK3  JUMPER-SMT_2_NC_TRACE_SILK  [SMT-JUMPER_2_NC_TRACE_SILK]  63.63,102.62 0 bottom
RX2-TX1  JUMPER-SMT_2_NC_TRACE_SILK  [SMT-JUMPER_2_NC_TRACE_SILK]  79.76,62.1 0 bottom
RX2-TX2  JUMPER-SMT_2_NC_TRACE_SILK  [SMT-JUMPER_2_NC_TRACE_SILK]  33.53,62.1 0 bottom
RX2-TX3  JUMPER-SMT_2_NC_TRACE_SILK  [SMT-JUMPER_2_NC_TRACE_SILK]  33.53,126.11 0 bottom
RX2-TX4  JUMPER-SMT_2_NC_TRACE_SILK  [SMT-JUMPER_2_NC_TRACE_SILK]  79.76,126.11 0 bottom
SHLD_NEO  JUMPER-SMT_2_NC_TRACE_SILK  [SMT-JUMPER_2_NC_TRACE_SILK]  12.83,58.29 270 bottom
SHLD_NEO1  JUMPER-SMT_2_NC_TRACE_SILK  [SMT-JUMPER_2_NC_TRACE_SILK]  59.05,58.29 270 bottom
SHLD_NEO2  JUMPER-SMT_2_NC_TRACE_SILK  [SMT-JUMPER_2_NC_TRACE_SILK]  12.83,122.3 270 bottom
SHLD_NEO3  JUMPER-SMT_2_NC_TRACE_SILK  [SMT-JUMPER_2_NC_TRACE_SILK]  59.05,122.3 270 bottom
SHLD_ZED  JUMPER-SMT_2_NC_TRACE_SILK  [SMT-JUMPER_2_NC_TRACE_SILK]  12.7,27.81 270 bottom
SHLD_ZED1  JUMPER-SMT_2_NC_TRACE_SILK  [SMT-JUMPER_2_NC_TRACE_SILK]  58.93,27.81 270 bottom
SHLD_ZED2  JUMPER-SMT_2_NC_TRACE_SILK  [SMT-JUMPER_2_NC_TRACE_SILK]  12.7,91.82 270 bottom
SHLD_ZED3  JUMPER-SMT_2_NC_TRACE_SILK  [SMT-JUMPER_2_NC_TRACE_SILK]  58.93,91.82 270 bottom
TP  JUMPER-SMT_2_NC_TRACE_SILK  [SMT-JUMPER_2_NC_TRACE_SILK]  17.4,43.69 0 bottom
TP1  JUMPER-SMT_2_NC_TRACE_SILK  [SMT-JUMPER_2_NC_TRACE_SILK]  63.63,43.69 0 bottom
TP2  JUMPER-SMT_2_NC_TRACE_SILK  [SMT-JUMPER_2_NC_TRACE_SILK]  17.4,107.7 0 bottom
TP3  JUMPER-SMT_2_NC_TRACE_SILK  [SMT-JUMPER_2_NC_TRACE_SILK]  63.63,107.7 0 bottom
TX2-RX1  JUMPER-SMT_2_NC_TRACE_SILK  [SMT-JUMPER_2_NC_TRACE_SILK]  82.3,62.1 0 bottom
TX2-RX2  JUMPER-SMT_2_NC_TRACE_SILK  [SMT-JUMPER_2_NC_TRACE_SILK]  36.07,62.1 0 bottom
TX2-RX3  JUMPER-SMT_2_NC_TRACE_SILK  [SMT-JUMPER_2_NC_TRACE_SILK]  36.07,126.11 0 bottom
TX2-RX4  JUMPER-SMT_2_NC_TRACE_SILK  [SMT-JUMPER_2_NC_TRACE_SILK]  82.3,126.11 0 bottom
U1  U-BLOX_NEO-D9S-00B  [NEO-M9N/M8T/M8U/D9S]  29.72,50.04 270 top
U2  3.3V  [SOT23-5]  48.77,51.31 180 top
U3  3.3V  [SOT23-5]  95,51.31 180 top
U4  U-BLOX_ZED-F9P  [ZED-F9P]  32.26,25.91 180 top
U5  ESD Diode  [SOT-23-6]  13.21,61.47 270 top
U6  ESD Diode  [SOT-23-6]  13.21,15.75 270 top
U7  BP2G1+_POWER_SPLITTER  [XX21]  36.4,39.09 90 top
U8  U-BLOX_NEO-D9S-00B  [NEO-M9N/M8T/M8U/D9S]  75.95,50.04 270 top
U9  U-BLOX_ZED-F9P  [ZED-F9P]  78.49,25.91 180 top
U10  ESD Diode  [SOT-23-6]  59.44,61.47 270 top
U11  ESD Diode  [SOT-23-6]  59.44,15.75 270 top
U12  BP2G1+_POWER_SPLITTER  [XX21]  82.63,39.09 90 top
U13  3.3V  [SOT23-5]  48.77,115.32 180 top
U14  U-BLOX_NEO-D9S-00B  [NEO-M9N/M8T/M8U/D9S]  29.72,114.05 270 top
U15  U-BLOX_ZED-F9P  [ZED-F9P]  32.26,89.92 180 top
U16  ESD Diode  [SOT-23-6]  13.21,125.48 270 top
U17  ESD Diode  [SOT-23-6]  13.21,79.76 270 top
U18  BP2G1+_POWER_SPLITTER  [XX21]  36.4,103.1 90 top
U19  3.3V  [SOT23-5]  95,115.32 180 top
U20  U-BLOX_NEO-D9S-00B  [NEO-M9N/M8T/M8U/D9S]  75.95,114.05 270 top
U21  U-BLOX_ZED-F9P  [ZED-F9P]  78.49,89.92 180 top
U22  ESD Diode  [SOT-23-6]  59.44,125.48 270 top
U23  ESD Diode  [SOT-23-6]  59.44,79.76 270 top
U24  BP2G1+_POWER_SPLITTER  [XX21]  82.63,103.1 90 top
U$1  [#GND#0]  30.99,68.58 270 top
U$2  [#GND#0]  11.18,30.99 0 top
U$3  [#GND#0]  23.37,8.64 90 bottom
U$4  [#GND#1]  23.37,8.64 270 top
U$5  [#GND#1]  11.18,30.99 0 bottom
U$6  [#GND#1]  30.99,68.58 90 bottom
U$7  [#SHLD_ZED#15]  12.7,22.73 90 bottom
U$8  [#SDA#0]  25.91,68.58 270 top
U$9  [#SCL#0]  30.99,8.64 90 bottom
U$10  [#SDA#0]  28.45,8.64 90 bottom
U$11  [#SDA#1]  28.45,8.64 270 top
U$12  [#SDA#1]  25.91,68.58 90 bottom
U$13  [#SCL#0]  23.37,68.58 270 top
U$14  [L#BAND18]  47.62,43.94 0 top
U$15  [#SCL#1]  23.37,68.58 90 bottom
U$16  [#RTK#0]  11.18,38.61 0 top
U$17  [#RTK#1]  11.18,38.61 0 bottom
U$18  [#GEO#0]  11.18,41.15 0 top
U$19  [#GEO#1]  11.18,41.15 0 bottom
U$20  [#5V#0]  11.18,36.07 0 top
U$21  [#5V#6]  11.18,36.07 0 bottom
U$22  [#3V3#0]  28.45,68.58 270 top
U$23  [#3V3#0]  25.91,8.64 90 bottom
U$24  [#3V3#4]  28.45,68.58 90 bottom
U$25  [#3V3#4]  25.91,8.64 270 top
U$26  [#TP#0]  11.18,43.69 0 top
U$27  [#TP#1]  11.18,43.69 0 bottom
U$28  [#TX_RDY#0]  11.18,46.23 0 top
U$29  [#TX_RDY#1]  11.18,46.23 0 bottom
U$30  [#SCL#1]  30.99,8.64 270 top
U$31  [#TX2#0]  36.07,61.47 90 bottom
U$32  [#RX2#0]  33.53,61.47 90 bottom
U$33  [L1#L218]  47.62,45.08 0 top
U$34  [#RX2#0]  33.53,8.64 270 top
U$35  [#RX2#0]  36.07,68.58 90 bottom
U$36  [#RX2#3]  36.07,68.58 270 top
U$37  [#RX2#3]  33.53,8.64 90 bottom
U$38  [#GND#0]  77.22,68.58 270 top
U$39  [#TX2#0]  36.07,8.64 270 top
U$40  [#TX2#0]  33.53,68.58 90 bottom
U$41  [#TX2#3]  33.53,68.58 270 top
U$42  [#TX2#3]  36.07,8.64 90 bottom
U$43  [#RX1#0]  38.61,8.64 270 top
U$44  [#RX1#0]  41.15,68.58 90 bottom
U$45  [##RESET##0]  46.23,8.64 270 top
U$46  [##RESET##1]  46.23,8.64 90 bottom
U$47  [#EXT_INT#0]  43.69,8.64 270 top
U$48  [#EXT_INT_ZED#0]  43.69,8.64 90 bottom
U$49  [#RX1#2]  41.15,68.58 270 top
U$50  [#RX1#2]  38.61,8.64 90 bottom
U$51  [#TX1#0]  41.15,8.64 270 top
U$52  [#I�C#0]  19.88,60.2 90 bottom
U$53  [#SHLD_NEO#12]  12.83,53.09 90 bottom
U$54  [ANTENNA18]  47.5,42.93 0 top
U$55  [NEO#D9S16]  33.78,38.73 90 bottom
U$56  [#3V3#0]  11.18,33.53 0 top
U$57  [#TX1#0]  38.61,68.58 90 bottom
U$58  [#ANT_PWR#0]  46.23,68.58 90 bottom
U$59  [#ANT_PWR#1]  46.23,68.58 270 top
U$60  [#TX1#2]  38.61,68.58 270 top
U$61  [#TX1#2]  41.15,8.64 90 bottom
U$62  [#EXT_INT_NEO#0]  43.69,68.58 270 top
U$63  [#EXT_INT_NEO#1]  43.69,68.58 90 bottom
U$64  [COMBO16]  31.88,38.73 90 bottom
U$65  [ZED#F9P10]  10.54,14.48 270 top
U$66  [NEO#D9S10]  10.54,62.48 270 top
U$67  [BREAKOUT17]  29.72,38.73 90 bottom
U$68  [SFE_LOGO_NAME_.2]  39.88,38.73 90 bottom
U$69  [#PWR#0]  18.29,33.53 0 bottom
U$70  [#3V3#4]  11.18,33.53 0 bottom
U$71  [##SAFEBOOT#_NEO#13]  22.1,48.13 90 bottom
U$72  [##SAFEBOOT#_ZED#14]  44.96,34.04 90 bottom
U$73  [OPEN_JUMPERS13]  31.62,57.78 90 bottom
U$74  [TO_ISOLATE_UART214]  30.23,57.78 90 bottom
U$75  [ZED#F9P_NEO#D9S_COMBO_BREAKOUT0]  33.15,35.43 0 top
U$76  [DEF_ADDRESS#_12]  18.54,60.2 90 bottom
U$77  [#GND#0]  57.4,30.99 0 top
U$78  [ZED#F9P16]  36.32,38.73 90 bottom
U$79  [NEO#D9S#13]  17.27,57.91 90 bottom
U$80  [ZED#F9P#13]  16,58.04 90 bottom
U$81  [0X4313]  17.27,63.63 90 bottom
U$82  [0X4213]  16,63.63 90 bottom
U$83  [#GND#0]  69.6,8.64 90 bottom
U$84  [#GND#1]  69.6,8.64 270 top
U$85  [#GND#1]  57.4,30.99 0 bottom
U$86  [#GND#1]  77.22,68.58 90 bottom
U$87  [#5V#0]  57.4,36.07 0 top
U$88  [#5V#6]  57.4,36.07 0 bottom
U$89  [#3V3#0]  74.68,68.58 270 top
U$90  [#3V3#0]  72.14,8.64 90 bottom
U$91  [#3V3#4]  74.68,68.58 90 bottom
U$92  [#3V3#4]  72.14,8.64 270 top
U$93  [##RESET##0]  92.46,8.64 270 top
U$94  [##RESET##1]  92.46,8.64 90 bottom
U$95  [#EXT_INT#0]  89.92,8.64 270 top
U$96  [#I�C#0]  66.1,60.2 90 bottom
U$97  [#3V3#0]  57.4,33.53 0 top
U$98  [#ANT_PWR#0]  92.46,68.58 90 bottom
U$99  [#ANT_PWR#1]  92.46,68.58 270 top
U$100  [#RTK#0]  57.4,38.61 0 top
U$101  [#RTK#1]  57.4,38.61 0 bottom
U$102  [#GEO#0]  57.4,41.15 0 top
U$103  [#GEO#1]  57.4,41.15 0 bottom
U$104  [#TP#0]  57.4,43.69 0 top
U$105  [#TP#1]  57.4,43.69 0 bottom
U$106  [#TX_RDY#0]  57.4,46.23 0 top
U$107  [#TX_RDY#1]  57.4,46.23 0 bottom
U$108  [#RX2#0]  79.76,8.64 270 top
U$109  [#RX2#0]  82.3,68.58 90 bottom
U$110  [#RX2#3]  82.3,68.58 270 top
U$111  [#RX2#3]  79.76,8.64 90 bottom
U$112  [#TX2#0]  82.3,8.64 270 top
U$113  [#TX2#0]  79.76,68.58 90 bottom
U$114  [#TX2#3]  79.76,68.58 270 top
U$115  [#TX2#3]  82.3,8.64 90 bottom
U$116  [#RX1#0]  84.84,8.64 270 top
U$117  [#RX1#0]  87.38,68.58 90 bottom
U$118  [#RX1#2]  87.38,68.58 270 top
U$119  [#RX1#2]  84.84,8.64 90 bottom
U$120  [#TX1#0]  87.38,8.64 270 top
U$121  [#TX1#0]  84.84,68.58 90 bottom
U$122  [#TX1#2]  84.84,68.58 270 top
U$123  [#TX1#2]  87.38,8.64 90 bottom
U$124  [#EXT_INT_NEO#0]  89.92,68.58 270 top
U$125  [#EXT_INT_NEO#1]  89.92,68.58 90 bottom
U$126  [#SDA#0]  72.14,68.58 270 top
U$127  [#SDA#0]  74.68,8.64 90 bottom
U$128  [#SDA#1]  74.68,8.64 270 top
U$129  [#SDA#1]  72.14,68.58 90 bottom
U$130  [#SCL#0]  77.22,8.64 90 bottom
U$131  [#SCL#0]  69.6,68.58 270 top
U$132  [#SCL#1]  69.6,68.58 90 bottom
U$133  [#SCL#1]  77.22,8.64 270 top
U$134  [#TX2#0]  82.3,61.47 90 bottom
U$135  [#RX2#0]  79.76,61.47 90 bottom
U$136  [ZED#F9P10]  56.77,14.48 270 top
U$137  [NEO#D9S10]  56.77,62.48 270 top
U$138  [#PWR#0]  64.52,33.53 0 bottom
U$139  [#3V3#4]  57.4,33.53 0 bottom
U$140  [#EXT_INT_ZED#0]  89.92,8.64 90 bottom
U$141  [ZED#F9P_NEO#D9S_COMBO_BREAKOUT0]  79.38,35.43 0 top
U$142  [##SAFEBOOT#_NEO#13]  68.33,48.13 90 bottom
U$143  [##SAFEBOOT#_ZED#14]  91.19,34.04 90 bottom
U$144  [#SHLD_ZED#15]  58.93,22.73 90 bottom
U$145  [#SHLD_NEO#12]  59.05,53.09 90 bottom
U$146  [ZED#F9P16]  82.55,38.73 90 bottom
U$147  [NEO#D9S16]  80.01,38.73 90 bottom
U$148  [COMBO16]  78.1,38.73 90 bottom
U$149  [BREAKOUT17]  75.95,38.73 90 bottom
U$150  [SFE_LOGO_NAME_.2]  86.11,38.73 90 bottom
U$151  [L1#L218]  93.85,45.08 0 top
U$152  [ANTENNA18]  93.73,42.93 0 top
U$153  [L#BAND18]  93.85,43.94 0 top
U$154  [OPEN_JUMPERS13]  77.85,57.78 90 bottom
U$155  [TO_ISOLATE_UART214]  76.45,57.78 90 bottom
U$156  [DEF_ADDRESS#_12]  64.77,60.2 90 bottom
U$157  [NEO#D9S#13]  63.5,57.91 90 bottom
U$158  [ZED#F9P#13]  62.23,58.04 90 bottom
U$159  [0X4313]  63.5,63.63 90 bottom
U$160  [0X4213]  62.23,63.63 90 bottom
U$161  [#GND#0]  30.99,132.59 270 top
U$162  [#GND#0]  11.18,95 0 top
U$163  [#GND#0]  23.37,72.64 90 bottom
U$164  [#GND#1]  23.37,72.64 270 top
U$165  [#GND#1]  11.18,95 0 bottom
U$166  [#GND#1]  30.99,132.59 90 bottom
U$167  [#5V#0]  11.18,100.08 0 top
U$168  [#5V#6]  11.18,100.08 0 bottom
U$169  [#3V3#0]  28.45,132.59 270 top
U$170  [#3V3#0]  25.91,72.64 90 bottom
U$171  [#3V3#4]  28.45,132.59 90 bottom
U$172  [#3V3#4]  25.91,72.64 270 top
U$173  [##RESET##0]  46.23,72.64 270 top
U$174  [##RESET##1]  46.23,72.64 90 bottom
U$175  [#EXT_INT#0]  43.69,72.64 270 top
U$176  [#I�C#0]  19.88,124.21 90 bottom
U$177  [#3V3#0]  11.18,97.54 0 top
U$178  [#ANT_PWR#0]  46.23,132.59 90 bottom
U$179  [#ANT_PWR#1]  46.23,132.59 270 top
U$180  [#RTK#0]  11.18,102.62 0 top
U$181  [#RTK#1]  11.18,102.62 0 bottom
U$182  [#GEO#0]  11.18,105.16 0 top
U$183  [#GEO#1]  11.18,105.16 0 bottom
U$184  [#TP#0]  11.18,107.7 0 top
U$185  [#TP#1]  11.18,107.7 0 bottom
U$186  [#TX_RDY#0]  11.18,110.24 0 top
U$187  [#TX_RDY#1]  11.18,110.24 0 bottom
U$188  [#RX2#0]  33.53,72.64 270 top
U$189  [#RX2#0]  36.07,132.59 90 bottom
U$190  [#RX2#3]  36.07,132.59 270 top
U$191  [#RX2#3]  33.53,72.64 90 bottom
U$192  [#TX2#0]  36.07,72.64 270 top
U$193  [#TX2#0]  33.53,132.59 90 bottom
U$194  [#TX2#3]  33.53,132.59 270 top
U$195  [#TX2#3]  36.07,72.64 90 bottom
U$196  [#RX1#0]  38.61,72.64 270 top
U$197  [#RX1#0]  41.15,132.59 90 bottom
U$198  [#RX1#2]  41.15,132.59 270 top
U$199  [#RX1#2]  38.61,72.64 90 bottom
U$200  [#TX1#0]  41.15,72.64 270 top
U$201  [#TX1#0]  38.61,132.59 90 bottom
U$202  [#TX1#2]  38.61,132.59 270 top
U$203  [#TX1#2]  41.15,72.64 90 bottom
U$204  [#EXT_INT_NEO#0]  43.69,132.59 270 top
U$205  [#EXT_INT_NEO#1]  43.69,132.59 90 bottom
U$206  [#SDA#0]  25.91,132.59 270 top
U$207  [#SDA#0]  28.45,72.64 90 bottom
U$208  [#SDA#1]  28.45,72.64 270 top
U$209  [#SDA#1]  25.91,132.59 90 bottom
U$210  [#SCL#0]  30.99,72.64 90 bottom
U$211  [#SCL#0]  23.37,132.59 270 top
U$212  [#SCL#1]  23.37,132.59 90 bottom
U$213  [#SCL#1]  30.99,72.64 270 top
U$214  [#TX2#0]  36.07,125.48 90 bottom
U$215  [#RX2#0]  33.53,125.48 90 bottom
U$216  [ZED#F9P10]  10.54,78.49 270 top
U$217  [NEO#D9S10]  10.54,126.49 270 top
U$218  [#PWR#0]  18.29,97.54 0 bottom
U$219  [#3V3#4]  11.18,97.54 0 bottom
U$220  [#EXT_INT_ZED#0]  43.69,72.64 90 bottom
U$221  [ZED#F9P_NEO#D9S_COMBO_BREAKOUT0]  33.15,99.44 0 top
U$222  [##SAFEBOOT#_NEO#13]  22.1,112.14 90 bottom
U$223  [##SAFEBOOT#_ZED#14]  44.96,98.04 90 bottom
U$224  [#SHLD_ZED#15]  12.7,86.74 90 bottom
U$225  [#SHLD_NEO#12]  12.83,117.09 90 bottom
U$226  [ZED#F9P16]  36.32,102.74 90 bottom
U$227  [NEO#D9S16]  33.78,102.74 90 bottom
U$228  [COMBO16]  31.88,102.74 90 bottom
U$229  [BREAKOUT17]  29.72,102.74 90 bottom
U$230  [SFE_LOGO_NAME_.2]  39.88,102.74 90 bottom
U$231  [L1#L218]  47.62,109.09 0 top
U$232  [ANTENNA18]  47.5,106.93 0 top
U$233  [L#BAND18]  47.62,107.95 0 top
U$234  [OPEN_JUMPERS13]  31.62,121.79 90 bottom
U$235  [TO_ISOLATE_UART214]  30.23,121.79 90 bottom
U$236  [DEF_ADDRESS#_12]  18.54,124.21 90 bottom
U$237  [NEO#D9S#13]  17.27,121.92 90 bottom
U$238  [ZED#F9P#13]  16,122.05 90 bottom
U$239  [0X4313]  17.27,127.64 90 bottom
U$240  [0X4213]  16,127.64 90 bottom
U$241  [#GND#0]  77.22,132.59 270 top
U$242  [#GND#0]  57.4,95 0 top
U$243  [#GND#0]  69.6,72.64 90 bottom
U$244  [#GND#1]  69.6,72.64 270 top
U$245  [#GND#1]  57.4,95 0 bottom
U$246  [#GND#1]  77.22,132.59 90 bottom
U$247  [#5V#0]  57.4,100.08 0 top
U$248  [#5V#6]  57.4,100.08 0 bottom
U$249  [#3V3#0]  74.68,132.59 270 top
U$250  [#3V3#0]  72.14,72.64 90 bottom
U$251  [#3V3#4]  74.68,132.59 90 bottom
U$252  [#3V3#4]  72.14,72.64 270 top
U$253  [##RESET##0]  92.46,72.64 270 top
U$254  [##RESET##1]  92.46,72.64 90 bottom
U$255  [#EXT_INT#0]  89.92,72.64 270 top
U$256  [#I�C#0]  66.1,124.21 90 bottom
U$257  [#3V3#0]  57.4,97.54 0 top
U$258  [#ANT_PWR#0]  92.46,132.59 90 bottom
U$259  [#ANT_PWR#1]  92.46,132.59 270 top
U$260  [#RTK#0]  57.4,102.62 0 top
U$261  [#RTK#1]  57.4,102.62 0 bottom
U$262  [#GEO#0]  57.4,105.16 0 top
U$263  [#GEO#1]  57.4,105.16 0 bottom
U$264  [#TP#0]  57.4,107.7 0 top
U$265  [#TP#1]  57.4,107.7 0 bottom
U$266  [#TX_RDY#0]  57.4,110.24 0 top
U$267  [#TX_RDY#1]  57.4,110.24 0 bottom
U$268  [#RX2#0]  79.76,72.64 270 top
U$269  [#RX2#0]  82.3,132.59 90 bottom
U$270  [#RX2#3]  82.3,132.59 270 top
U$271  [#RX2#3]  79.76,72.64 90 bottom
U$272  [#TX2#0]  82.3,72.64 270 top
U$273  [#TX2#0]  79.76,132.59 90 bottom
U$274  [#TX2#3]  79.76,132.59 270 top
U$275  [#TX2#3]  82.3,72.64 90 bottom
U$276  [#RX1#0]  84.84,72.64 270 top
U$277  [#RX1#0]  87.38,132.59 90 bottom
U$278  [#RX1#2]  87.38,132.59 270 top
U$279  [#RX1#2]  84.84,72.64 90 bottom
U$280  [#TX1#0]  87.38,72.64 270 top
U$281  [#TX1#0]  84.84,132.59 90 bottom
U$282  [#TX1#2]  84.84,132.59 270 top
U$283  [#TX1#2]  87.38,72.64 90 bottom
U$284  [#EXT_INT_NEO#0]  89.92,132.59 270 top
U$285  [#EXT_INT_NEO#1]  89.92,132.59 90 bottom
U$286  [#SDA#0]  72.14,132.59 270 top
U$287  [#SDA#0]  74.68,72.64 90 bottom
U$288  [#SDA#1]  74.68,72.64 270 top
U$289  [#SDA#1]  72.14,132.59 90 bottom
U$290  [#SCL#0]  77.22,72.64 90 bottom
U$291  [#SCL#0]  69.6,132.59 270 top
U$292  [#SCL#1]  69.6,132.59 90 bottom
U$293  [#SCL#1]  77.22,72.64 270 top
U$294  [#TX2#0]  82.3,125.48 90 bottom
U$295  [#RX2#0]  79.76,125.48 90 bottom
U$296  [ZED#F9P10]  56.77,78.49 270 top
U$297  [NEO#D9S10]  56.77,126.49 270 top
U$298  [#PWR#0]  64.52,97.54 0 bottom
U$299  [#3V3#4]  57.4,97.54 0 bottom
U$300  [#EXT_INT_ZED#0]  89.92,72.64 90 bottom
U$301  [ZED#F9P_NEO#D9S_COMBO_BREAKOUT0]  79.38,99.44 0 top
U$302  [##SAFEBOOT#_NEO#13]  68.33,112.14 90 bottom
U$303  [##SAFEBOOT#_ZED#14]  91.19,98.04 90 bottom
U$304  [#SHLD_ZED#15]  58.93,86.74 90 bottom
U$305  [#SHLD_NEO#12]  59.05,117.09 90 bottom
U$306  [ZED#F9P16]  82.55,102.74 90 bottom
U$307  [NEO#D9S16]  80.01,102.74 90 bottom
U$308  [COMBO16]  78.1,102.74 90 bottom
U$309  [BREAKOUT17]  75.95,102.74 90 bottom
U$310  [SFE_LOGO_NAME_.2]  86.11,102.74 90 bottom
U$311  [L1#L218]  93.85,109.09 0 top
U$312  [ANTENNA18]  93.73,106.93 0 top
U$313  [L#BAND18]  93.85,107.95 0 top
U$314  [OPEN_JUMPERS13]  77.85,121.79 90 bottom
U$315  [TO_ISOLATE_UART214]  76.45,121.79 90 bottom
U$316  [DEF_ADDRESS#_12]  64.77,124.21 90 bottom
U$317  [NEO#D9S#13]  63.5,121.92 90 bottom
U$318  [ZED#F9P#13]  62.23,122.05 90 bottom
U$319  [0X4313]  63.5,127.64 90 bottom
U$320  [0X4213]  62.23,127.64 90 bottom
USB-NEO  USB Female Type C Connector  [USB-C-16P_4LAYER-PADS]  15.75,53.85 270 top
USB-NEO1  USB Female Type C Connector  [USB-C-16P_4LAYER-PADS]  61.98,53.85 270 top
USB-NEO2  USB Female Type C Connector  [USB-C-16P_4LAYER-PADS]  15.75,117.86 270 top
USB-NEO3  USB Female Type C Connector  [USB-C-16P_4LAYER-PADS]  61.98,117.86 270 top
USB-ZED  USB Female Type C Connector  [USB-C-16P_4LAYER-PADS]  15.75,23.37 270 top
USB-ZED1  USB Female Type C Connector  [USB-C-16P_4LAYER-PADS]  61.98,23.37 270 top
USB-ZED2  USB Female Type C Connector  [USB-C-16P_4LAYER-PADS]  15.75,87.38 270 top
USB-ZED3  USB Female Type C Connector  [USB-C-16P_4LAYER-PADS]  61.98,87.38 270 top
V_BKCP  TEST-POINT3X5  [PAD.03X.05]  42.42,52.58 0 bottom
V_BKCP1  TEST-POINT3X5  [PAD.03X.05]  88.65,52.58 0 bottom
V_BKCP2  TEST-POINT3X5  [PAD.03X.05]  42.42,116.59 0 bottom
V_BKCP3  TEST-POINT3X5  [PAD.03X.05]  88.65,116.59 0 bottom

## Library data of the parts
!SAFEBOOT_NEO! !SAFEBOOT_NEO!1-!SAFEBOOT_NEO!3 !SAFEBOOT_ZED! !SAFEBOOT_ZED!1-!SAFEBOOT_ZED!3 J5 J7-J10 J12-J16 J20-J24 J28-J32 V_BKCP V_BKCP1-V_BKCP3 = SparkFun-Connectors
BT1-BT4 = SparkFun-Batteries; PROD_ID: BAT-16685
C1 C7 C15 C18 C26 C29 C37 C40 = SparkFun-Capacitors; PROD_ID: CAP-08913
C2-C4 C6 C8 C9 C12 C14 C16 C17 C19 C20 C23 C25 C27 C28 C30 C31 C34 C36 C38 C39 C41 C42 = SparkFun-Capacitors; PROD_ID: CAP-00868
C5 C10 C11 C13 C21 C22 C24 C32 C33 C35 C43 C44 = SparkFun-Capacitors; PROD_ID: CAP-00810
D1 D2 D9 D13 = SparkFun-DiscreteSemi; DIGIKEY_PART: PESD0402-140CT-ND; MOUSE_PART: 650-PESD0402-140; PROD_ID: DIO-15359
D3 D4 D10 D14 = SparkFun-DiscreteSemi; PROD_ID: DIO-10955
D5-D8 D11 D12 D15 D16 = SparkFun-DiscreteSemi; PROD_ID: DIO-11623
E$1-E$4 LOGO1-LOGO20 U$68 U$150 U$230 U$310 = SparkFun-Aesthetics
E$5 E$6 = SparkFun-Retired
FB1-FB4 = SparkFun-Coils; PROD_ID: NDUC-13805
GEO GEO1-GEO3 I2C I2C1-I2C3 PWR\ PWR\1-PWR\3 RTK RTK1-RTK3 RX2-TX1-RX2-TX4 SHLD_NEO SHLD_NEO1-SHLD_NEO3 SHLD_ZED SHLD_ZED1-SHLD_ZED3 TP TP1-TP3 TX2-RX1-TX2-RX4 = SparkFun-Jumpers
J1 J11 J19 J27 = SparkFun-RF; PROD_ID: CONN-08289
J2-J4 J6 J17 J18 J25 J26 = SparkFun-Connectors; PROD_ID: CONN-13694
JP1-JP25 JP31 JP41 JP61 JP71 JP81 JP91 JP101 = SparkFun
L1-L4 = SparkFun-Coils
LED1 LED5 LED9 LED13 = SparkFun-LED; PROD_ID: DIO-17976
LED2-LED4 LED6-LED8 LED10-LED12 LED14-LED16 = SparkFun-LED; PROD_ID: DIO-08575
R1 R41 R75 R109 = SparkFun-Resistors; PROD_ID: RES-07857
R2-R6 R11 R17-R26 R30 R31 R35 R36 R39 R40 R47 R48 R51-R60 R64 R65 R69 R70 R73 R74 R81 R82 R85-R94 R98 R99 R103 R104 R107 R108 R115 R116 R119-R128 R132 R133 = SparkFun-Resistors; PROD_ID: RES-08270
R7 R8 R37 R38 R71 R72 R105 R106 = SparkFun-Resistors; PROD_ID: RES-08272
R9 R10 R15 R16 R42 R43 R49 R50 R76 R77 R83 R84 R110 R111 R117 R118 = SparkFun-Resistors; PROD_ID: RES-09334
R12 R13 R33 R34 R45 R46 R67 R68 R79 R80 R101 R102 R113 R114 R135 R136 = SparkFun-Resistors; PROD_ID: RES-12083
R14 R44 R78 R112 = SparkFun-Resistors; PROD_ID: RES-12581
R27-R29 R61-R63 R95-R97 R129-R131 = SparkFun-Resistors; PROD_ID: RES-07856
R32 R66 R100 R134 = SparkFun-Resistors; PROD_ID: RES-07851
U1 U8 U14 U20 = SparkFun-GPS; PROD_ID: IC-16579
U2 U3 U13 U19 = SparkFun-IC-Power; PROD_ID: VREG-12457
U4 U9 U15 U21 = SparkFun-GPS; PROD_ID: IC-14209
U5 U6 U10 U11 U16 U17 U22 U23 = SparkFun-DiscreteSemi; PROD_ID: IC-13538
U7 U12 U18 U24 = SparkFun-RF; PROD_ID: IC-17198
U$1-U$6 U$8-U$13 U$15-U$32 U$34-U$52 U$56-U$63 U$65 U$66 U$69 U$70 U$75 U$77 U$83-U$141 U$161-U$221 U$241-U$301 = output
U$7 U$14 U$33 U$53-U$55 U$64 U$67 U$71-U$74 U$76 U$78-U$82 U$142-U$149 U$151-U$160 U$222-U$229 U$231-U$240 U$302-U$309 U$311-U$320 = top
USB-NEO USB-NEO1-USB-NEO3 USB-ZED USB-ZED1-USB-ZED3 = SparkFun-Connectors; PROD_ID: CONN-14122